# Altium PCB PA_Channel_SUP_CTRL.PcbDoc (part 2 of 2)
Units mil, origin at the board's own origin, x right, y up, seen from the top; angles counter-clockwise.
Board outline 7464.6 x 1234.28 mil, 2 copper layers (Top Layer, Bottom Layer), stack 61.855 mil thick; 31 components, 29 nets, 149 pads, 174 vias.
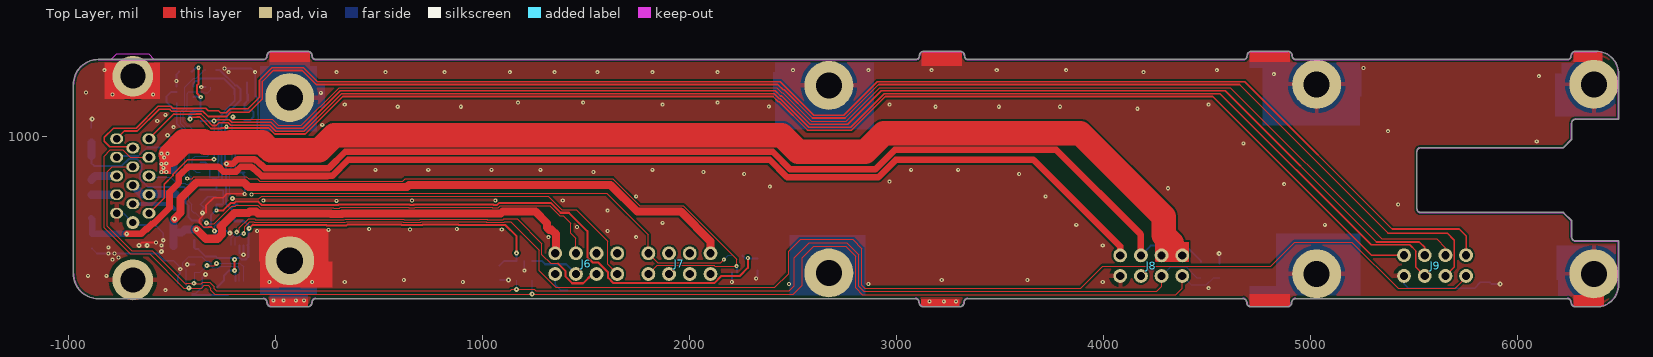
[diagram p0: Top Layer view]

## Silkscreen, mask and mechanical layers (free items; w line width, h text height) (continued)
Mechanical 1: (continued)
  lines w3.94: -974.41,324.8 -974.41,433.07 -974.41,472.44 -974.41,1141.73 -974.41,1250 cw(c-856.3,1250) -856.3,1368.11 -59.06,1368.11 ccw(c-59.06,1387.8) -39.37,1387.8 cw(c-19.69,1387.8) -19.69,1407.48 ; -974.41,334.65 ccw(c-856.3,334.65) -856.3,216.54 -59.06,216.54 cw(c-59.06,196.85) -39.37,196.85 ccw(c-19.69,196.85) -19.69,177.17 157.48,177.17 ; -21.65,1407.48 155.51,1407.48 cw(c155.51,1387.8) 175.2,1387.8 ccw(c194.88,1387.8) 194.88,1368.11 3092.52,1368.11 ccw(c3092.52,1387.8) 3112.2,1387.8 cw(c3131.89,1387.8) 3131.89,1407.48 ; 155.51,177.17 ccw(c155.51,196.85) 175.2,196.85 cw(c194.88,196.85) 194.88,216.54 3090.55,216.54 cw(c3090.55,196.85) 3110.24,196.85 ccw(c3129.92,196.85) 3129.92,177.17 3307.09,177.17 ; 3129.92,1407.48 3307.09,1407.48 cw(c3307.09,1387.8) 3326.77,1387.8 ccw(c3346.46,1387.8) 3346.46,1368.11 4675.2,1368.11 ccw(c4675.2,1387.8) 4694.88,1387.8 cw(c4714.57,1387.8) 4714.57,1407.48 ; 3305.12,177.17 ccw(c3305.12,196.85) 3324.8,196.85 cw(c3344.49,196.85) 3344.49,216.54 4673.23,216.54 cw(c4673.23,196.85) 4692.91,196.85 ccw(c4712.6,196.85) 4712.6,177.17 4889.76,177.17 ; 4712.6,1407.48 4889.76,1407.48 cw(c4889.76,1387.8) 4909.45,1387.8 ccw(c4929.13,1387.8) 4929.13,1368.11 6240.16,1368.11 ccw(c6240.16,1387.8) 6259.84,1387.8 cw(c6279.53,1387.8) 6279.53,1407.48 6380.9,1407.48 cw(c6380.9,1302.16) 6486.22,1302.16 6486.22,1250 6486.22,1082.68 6338.58,1082.68 6279.53,1082.68 ccw(c6279.53,1062.99) 6259.84,1062.99 6259.84,984.25 6220.47,944.88 5826.77,944.88 5531.5,944.88 ccw(c5531.5,925.2) 5511.81,925.2 5511.81,836.61 5511.81,649.61 ccw(c5531.5,649.61) 5531.5,629.92 6161.42,629.92 6220.47,629.92 6259.84,590.55 6259.84,511.81 ccw(c6279.53,511.81) 6279.53,492.13 6338.58,492.13 6486.22,492.13 ; 4887.8,177.17 ccw(c4887.8,196.85) 4907.48,196.85 cw(c4927.17,196.85) 4927.17,216.54 6240.16,216.54 cw(c6240.16,196.85) 6259.84,196.85 ccw(c6279.53,196.85) 6279.53,177.17 ; 6361.54,177.17 6279.53,177.17 ; 6485.94,281.1 cw(c6382,281.1) 6382,177.17 6279.53,177.17 ; 6486.22,281.1 6486.22,334.65 ; 6486.22,334.65 6486.22,334.65 ; 6486.22,334.65 6486.22,492.13 ; 6486.22,492.13 6486.22,492.13
Mechanical 2:
  circle w0.5: c390.29,103.27 r39.63
  circle w0.5: c3453.28,103.27 r39.63
  circle w0.5: c4110.76,1149.53 r39.63
  circle w0.5: c1921.79,103.27 r39.63
  circle w0.5: c6516.28,103.27 r39.63
  circle w0.5: c6368.64,334.57 r39.63
  circle w0.5: c4106.83,684.96 r39.63
  circle w0.5: c390.29,1481.22 r39.63
  circle w0.5: c6368.64,1249.92 r39.63
  circle w0.5: c69.43,398.54 r39.63
  circle w0.5: c4801.71,1249.92 r39.63
  circle w0.5: c-1160.89,792.24 r39.63
  circle w0.5: c5030.06,1249.92 r39.63
  circle w0.5: c3455.25,1249.92 r39.63
  circle w0.5: c3455.25,334.57 r39.63
  circle w0.5: c-688.44,305.05 r118.11
  circle w0.5: c3219.03,334.57 r39.63
  circle w0.5: c4984.78,1481.22 r39.63
  circle w0.5: c-1141.2,1481.22 r39.63
  circle w0.5: c-688.44,1289.3 r118.11
  circle w0.5: c-1141.2,103.27 r39.63
  circle w0.5: c3219.03,1249.92 r39.63
  circle w0.5: c325.33,334.57 r39.63
  circle w0.5: c4801.71,334.57 r39.63
  circle w0.5: c325.33,1249.92 r39.63
  circle w0.5: c3453.28,1481.22 r39.63
  circle w0.5: c4984.78,103.27 r39.63
  circle w0.5: c69.43,1185.94 r39.63
  circle w0.5: c5030.06,334.57 r39.63
  circle w0.5: c6516.28,1481.22 r39.63
  circle w0.5: c1921.79,1481.22 r39.63
  lines w0.39: 5029.53,1206 5029.53,1250 5083.53,1250
  lines w0.5: 289.41,351.3 361.25,351.3 ; 3183.11,351.3 3254.95,351.3 ; 3419.33,351.3 3491.17,351.3 ; 4067.31,682.01 4146.34,682.01 ; 4076.96,1170.2 4144.57,1170.2 ; 4765.79,351.3 4837.63,351.3 ; 4994.14,351.3 5065.98,351.3 ; 6332.72,351.3 6404.56,351.3 ; 6496.59,319.8 cw(c6378.48,319.8) 6378.48,201.69 6181.63,201.69 ; 6496.59,1264.68 ccw(c6378.48,1264.68) 6378.48,1382.8 6181.63,1382.8 ; -1259.31,4.84 -1259.31,1579.65 ; -1259.31,4.84 -1416.79,4.84 -1416.79,1579.65 -1259.31,1579.65 ; -1259.31,4.84 6614.7,4.84 6614.7,1579.65 -1259.31,1579.65 ; -126.44,212.89 ccw(c-29.55,280.43) -29.55,162.32 168.4,162.32 ccw(c168.4,280.43) 265.29,212.89 ; -126.44,212.89 ccw(c-176.64,319.8) -58.53,319.8 -58.53,1264.68 ccw(c-176.64,1264.68) -126.44,1371.6 ; -126.44,212.89 cw(c-176.64,319.8) -176.64,201.69 -393.17,201.69 cw(c-481.21,280.43) -481.21,162.32 -944.35,162.32 cw(c-944.35,280.43) -1062.46,280.43 -1062.46,1304.06 cw(c-944.35,1304.06) -944.35,1422.17 -481.21,1422.17 cw(c-481.21,1304.06) -393.17,1382.8 -176.64,1382.8 cw(c-176.64,1264.68) -126.44,1371.6 ; -126.44,1371.6 cw(c-29.55,1304.06) -29.55,1422.17 168.4,1422.17 cw(c168.4,1304.06) 265.29,1371.6 ; 197.38,824.26 cw(c266.28,920.2) 148.17,920.2 148.17,930.04 cw(c266.28,930.04) 197.38,1025.97 ; 197.38,824.26 ccw(c266.28,920.2) 266.28,802.09 522.18,802.09 ccw(c522.18,920.2) 640.29,920.2 640.29,930.04 ccw(c522.18,930.04) 522.18,1048.15 266.28,1048.15 ccw(c266.28,930.04) 197.38,1025.97 ; 197.38,824.26 197.38,319.8 ccw(c315.49,319.8) 265.29,212.89 ; 197.38,1025.97 197.38,1264.68 cw(c315.49,1264.68) 265.29,1371.6 ; 265.29,212.89 ccw(c315.49,319.8) 315.49,201.69 3032.02,201.69 ; 265.29,1371.6 cw(c315.49,1264.68) 315.49,1382.8 3032.02,1382.8 ; 3032.02,201.69 ccw(c3120.06,280.43) 3120.06,162.32 3337.69,162.32 ccw(c3337.69,280.43) 3425.72,201.69 ; 3032.02,201.69 3425.72,201.69 ; 3032.02,1382.8 cw(c3120.06,1304.06) 3120.06,1422.17 3337.69,1422.17 cw(c3337.69,1304.06) 3425.72,1382.8 ; 3032.02,1382.8 3425.72,1382.8 ; 3425.72,201.69 4547.77,201.69 ; 3425.72,1382.8 4547.77,1382.8 ; 4547.77,201.69 ccw(c4635.81,280.43) 4635.81,162.32 4853.44,162.32 ccw(c4853.44,280.43) 4941.47,201.69 ; 4547.77,201.69 4941.47,201.69 ; 4547.77,1382.8 cw(c4635.81,1304.06) 4635.81,1422.17 4853.44,1422.17 cw(c4853.44,1304.06) 4941.47,1382.8 ; 4547.77,1382.8 4941.47,1382.8 ; 4941.47,201.69 6181.63,201.69 ; 4941.47,1382.8 6181.63,1382.8 ; 6181.63,201.69 ccw(c6269.66,280.43) 6269.66,162.32 6378.48,162.32 ccw(c6378.48,280.43) 6496.59,280.43 6496.59,625.47 ; 6181.63,1382.8 cw(c6269.66,1304.06) 6269.66,1422.17 6378.48,1422.17 cw(c6378.48,1304.06) 6496.59,1304.06 6496.59,998.39 ; 6496.59,625.47 cw(c6417.85,713.5) 6417.85,595.39 6004.46,595.39 cw(c6004.46,713.5) 5886.35,713.5 5886.35,910.35 cw(c6004.46,910.35) 6004.46,1028.46 6417.85,1028.46 cw(c6417.85,910.35) 6496.59,998.39 ; 6496.59,625.47 ccw(c6417.85,713.5) 6535.96,713.5 6535.96,910.35 ccw(c6417.85,910.35) 6496.59,998.39 ; -889.23,573.97 ccw(c-771.12,573.97) -791.63,457.65 -626.27,428.49 ccw(c-605.76,544.81) -487.65,544.81 -487.65,1049.53 ccw(c-605.76,1049.53) -626.27,1165.85 -791.63,1136.69 ccw(c-771.12,1020.38) -889.23,1020.38 -889.23,573.97
Mechanical 3:
  drawing of 155 lines, arcs and shapes, not listed

## Text inside footprints (layer, text, board x,y; h text height)
J6: Bottom Overlay "1" at 1728.18,423.86 h47.24
J7: Bottom Overlay "1" at 2178.18,423.86 h47.24
J8: Bottom Overlay "1" at 4457.32,414.02 h47.24
J9: Bottom Overlay "1" at 5828.18,414.65 h47.24